# Altium PCB 5 line.PcbDoc
Units mm, origin at the board's own origin, x right, y up, seen from the top; angles counter-clockwise.
Board outline 152.4 x 101.6 mm, 2 copper layers (Top Layer, Bottom Layer); 21 components, 12 nets, 53 pads, 0 vias.
Unrouted connection lines stored in the file: 37.
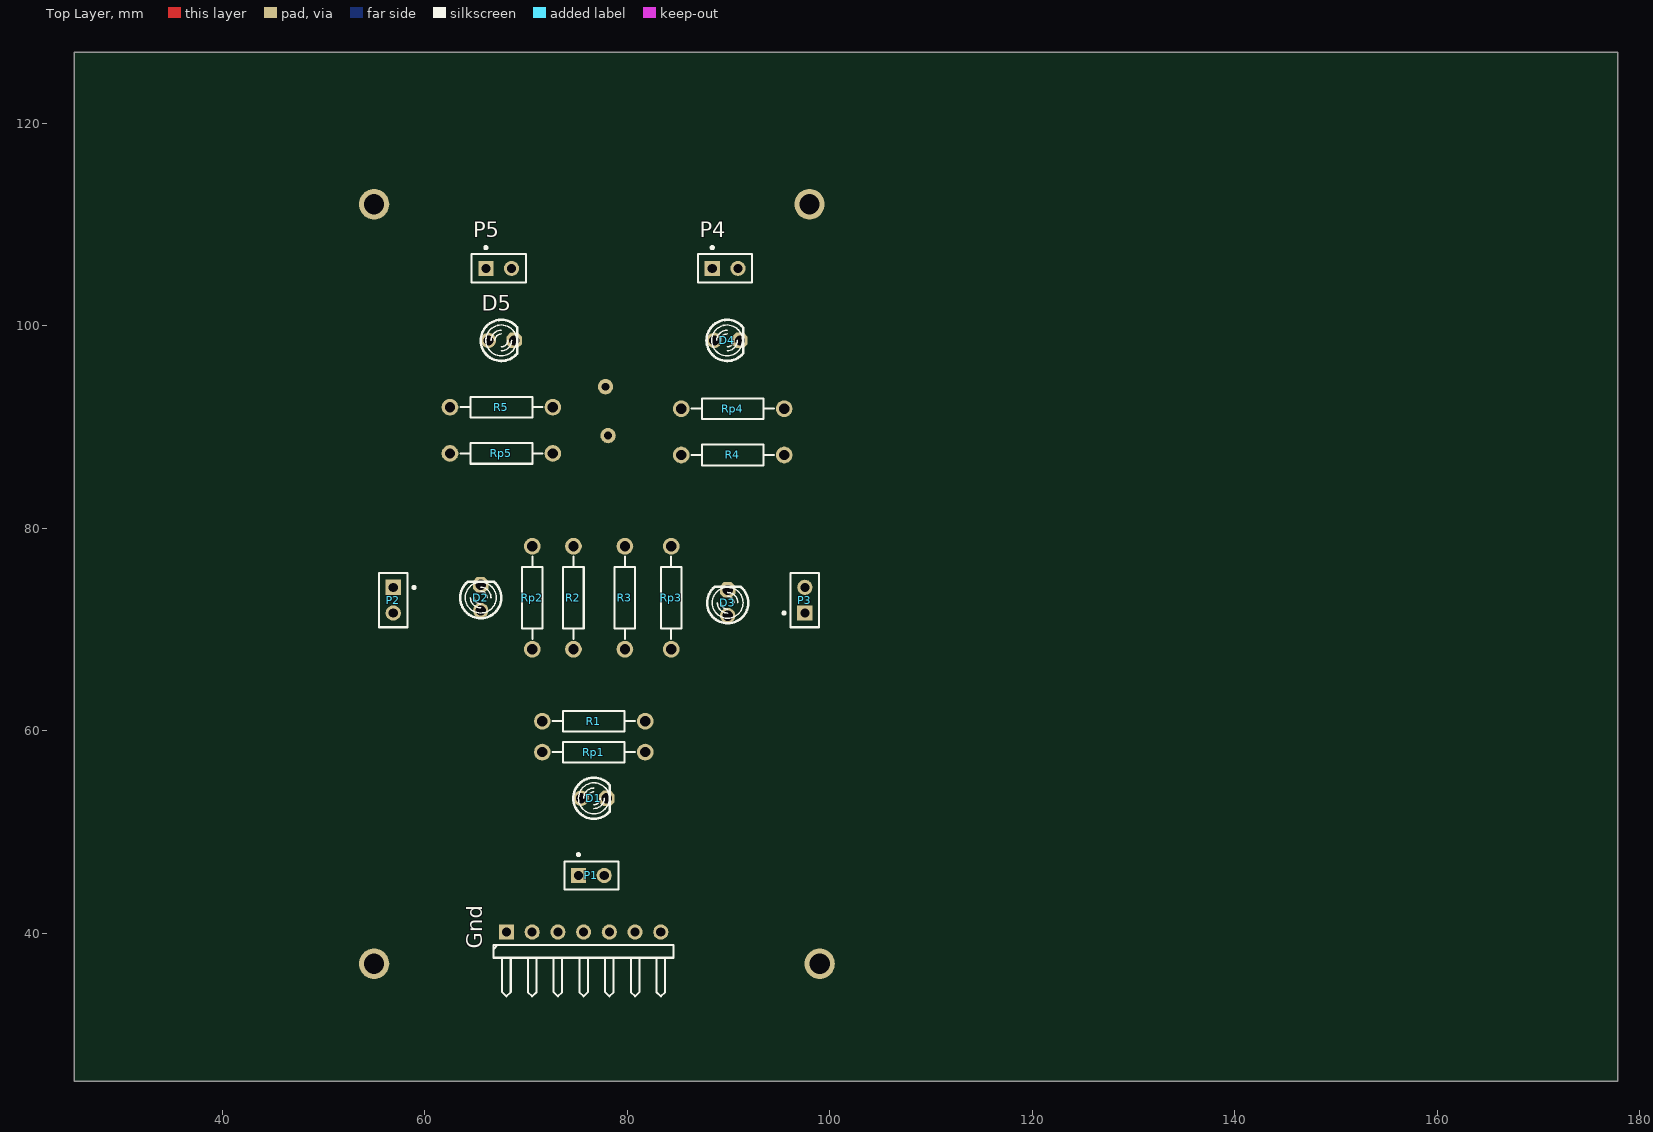
[diagram p0: Top Layer view]
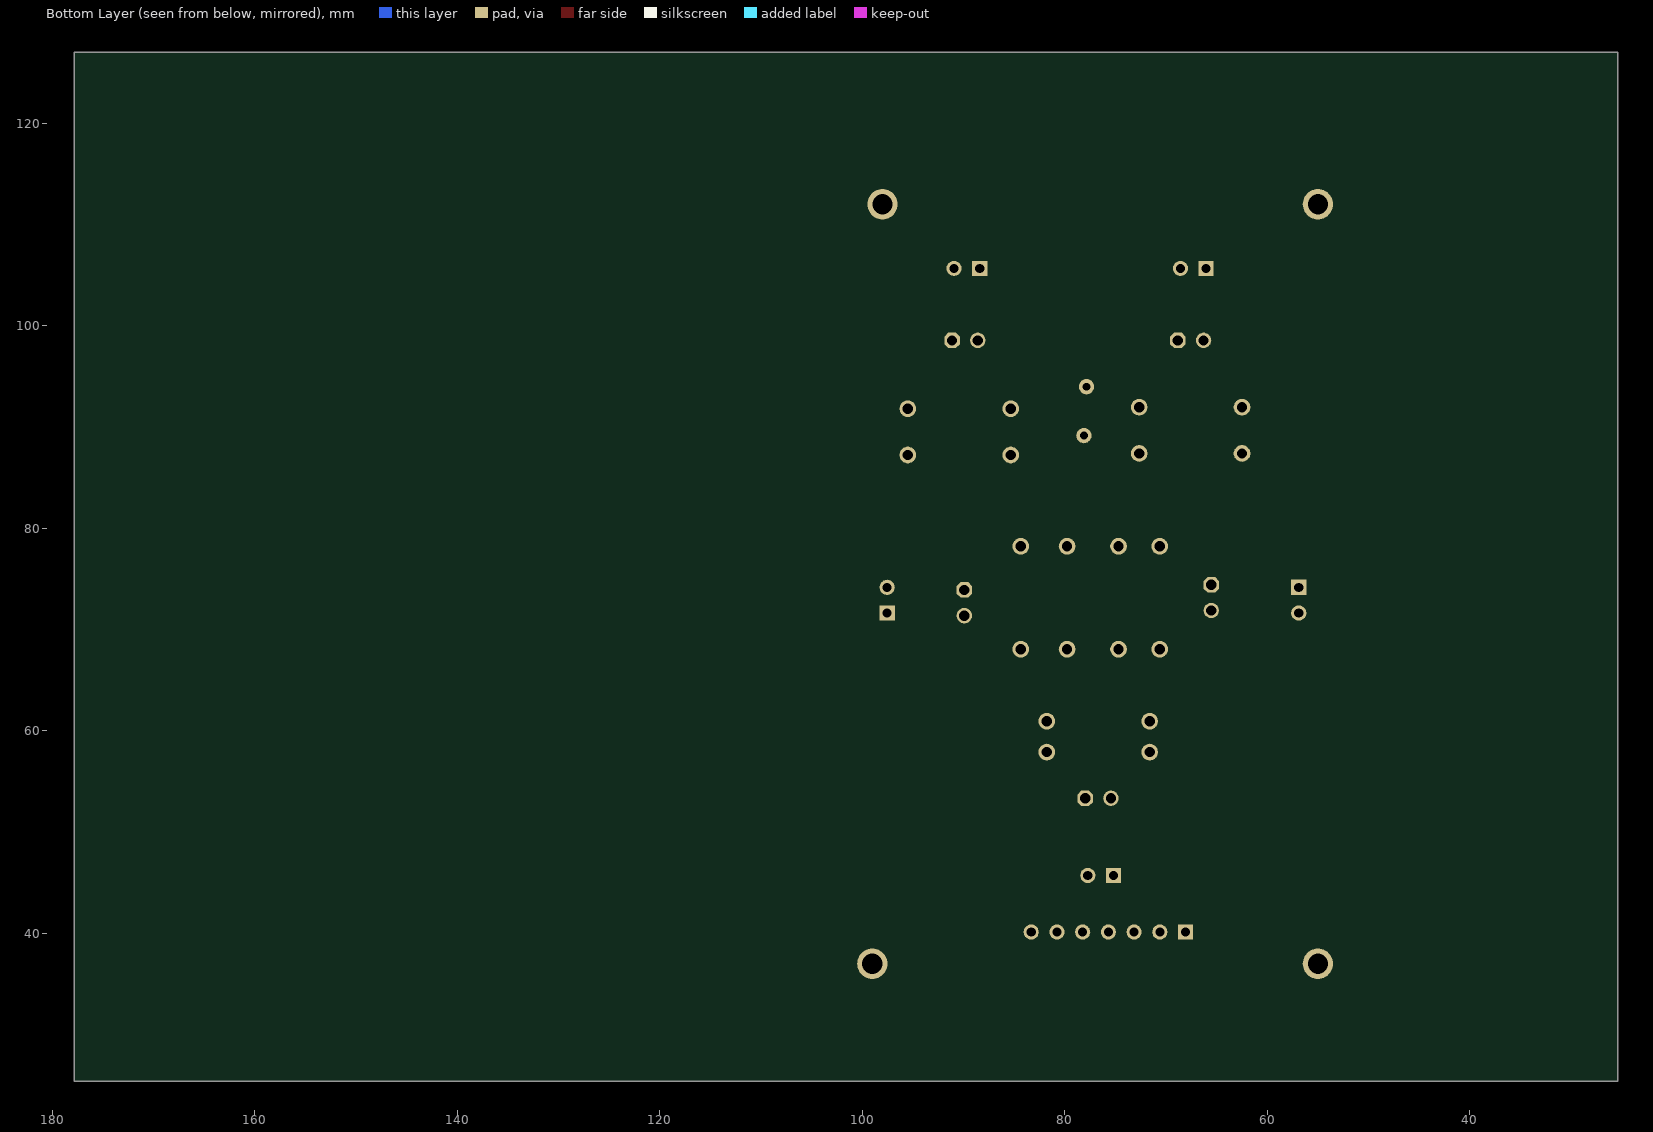
[diagram p1: Bottom Layer view, seen from below]

## Layer stack, top to bottom
Top Layer: signal copper 0.0356
Dielectric: dielectric 0.32, FR-4, Dk 4.8
Bottom Layer: signal copper 0.0356

## Board outline
25.4,25.4 177.8,25.4 177.8,127 25.4,127

## Design rules (kind name [scope] priority, off if disabled: settings)
Clearance [All] p1: gap=0.32
PolygonConnect [All] p1: connectstyle=Relief reliefconductorwidth=0.254 reliefentries=4 polygonreliefangle="90 Angle"
RoutingVias [All] p1: holewidth=0.711 width=1.27 viastyle="Through Hole" minholewidth=0.711 minwidth=1.27 maxholewidth=0.711 maxwidth=1.27
SilkscreenOverComponentPads [All] p1: minsilkscreentomaskgap=0.254
SolderMaskExpansion [All] p1: expansion=0.102
Width [All] p1: maxlimit=0.75 minlimit=0.75 preferedwidth=0.75
27 further rules are at their usual default settings.

## Components (designator, comment, footprint, x,y, rotation, side; value= is the part's Value field where it differs from the comment)
D1 "LED" My_LED3MM 76.708,53.34 r0 top
D2 "LED" My_LED3MM 65.532,73.152 r90 top
D3 "LED" My_LED3MM 89.916,72.644 r90 top
D4 "LED" My_LED3MM 89.86,98.552 r0 top
D5 "LED" My_LED3MM 67.564,98.552 r0 top
Gnd "Header 7H" HDR1X7H 68.072,40.132 r0 top (schematic designator Konektor)
P1 "Photo Sen" PIN2 75.184,45.72 r0 top
P2 "Photo Sen" PIN2 56.896,74.168 r270 top
P3 "Photo Sen" PIN2 97.536,71.628 r90 top
P4 "Photo Sen" PIN2 88.392,105.664 r0 top
P5 "Photo Sen" PIN2 66.04,105.664 r0 top
R1 "1k" My_axial-0.4 76.708,60.96 r0 top
R2 "1k" My_axial-0.4 74.676,73.152 r90 top
R3 "1k" My_axial-0.4 79.756,73.152 r90 top
R4 "1k" My_axial-0.4 90.424,87.249 r0 top
R5 "1k" My_axial-0.4 67.564,91.948 r180 top
Rp1 "1k" My_axial-0.4 76.708,57.912 r0 top
Rp2 "1k" My_axial-0.4 70.612,73.152 r90 top
Rp3 "1k" My_axial-0.4 84.328,73.152 r90 top
Rp4 "1k" My_axial-0.4 90.424,91.821 r0 top
Rp5 "1k" My_axial-0.4 67.564,87.376 r180 top

## Footprints (in the part's own frame and the unit in brackets; to place one, negate y for a bottom-side part, rotate by r counter-clockwise, add the part's x,y. Pads: shape width x height; smd on the part's side, far side on the other; paste and mask are expansions set on the pad)
HDR1X7H [mm] "Connector; Header; 7 Position; Right Angle"
  rect 1.5x1.5 hole 0.9: 1(0,0)
  round 1.5 hole 0.9: 2(2.54,0) 3(5.08,0) 4(7.62,0) 5(10.16,0) 6(12.7,0) 7(15.24,0)
  silkscreen extent -1.27,-6.35 16.51,-1.27
My_axial-0.4 [mil]
  round 65 hole 40: 1(-200.5,-0.5) 2(199.5,-0.5)
  silkscreen extent -160,-40 160,40
My_LED3MM [mil]
  round 60 hole 40: A(-50,0)
  oct 60x60 hole 40: K(50,0)
  silkscreen extent -80,-80 62,80
PIN2 [mm] "Photosensitive Diode; 2 Leads"
  rect 1.5x1.5 hole 0.9: 1(0,0)
  round 1.5 hole 0.9: 2(2.54,0)
  silkscreen extent -1.4,-1.4 3.94,2.17

## Part data
D1 D2 D3 D4 D5: "Typical INFRARED GaAs LED"
Gnd: "Header, 7-Pin, Right Angle"
P1 P2 P3 P4 P5: "Photosensitive Diode"
R1 R2 R3 R4 R5 Rp1 Rp2 Rp3 Rp4 Rp5: library part Res, "resistor 1/4 wat"

## Free pads (board coordinates)
  round 3 hole 2: 0(55,37) 0(55,112) 0(98,112) 0(99,37)
  round 1.524 hole 0.762: 4(78.105,89.154) 6(77.851,93.98)

## Nets (pads, with @x,y where several pads share a name; then routed paths per layer and width w, separated by ;. In a path a pad name is that pad's centre, name@x,y a point inside that pad or via, vN(x,y) a via of type N, cw(c..) or ccw(c..) an arc to the next point about the centre after c; other vN are vias at no path point)
GND: D1.K D2.K D3.K D4.K D5.K Gnd.1 P1.1 P2.1 P3.1 P4.1 P5.1 pad.4 pad.6
NetD1_A: D1.A R1.2
NetD2_A: D2.A R2.2
NetD3_A: D3.A R3.2
NetD4_A: D4.A R4.2
NetD5_A: D5.A R5.2
NetKonektor_3: Gnd.3 P1.2 Rp1.2
NetKonektor_4: Gnd.4 P2.2 Rp2.2
NetKonektor_5: Gnd.5 P3.2 Rp3.2
NetKonektor_6: Gnd.6 P4.2 Rp4.2
NetKonektor_7: Gnd.7 P5.2 Rp5.2
VCC: Gnd.2 R1.1 R2.1 R3.1 R4.1 R5.1 Rp1.1 Rp2.1 Rp3.1 Rp4.1 Rp5.1